# Altium PCB Pet_Tracker_PCB1.PcbDoc
Units mil, origin at the board's own origin, x right, y up, seen from the top; angles counter-clockwise.
Board outline 1653.54 x 1771.65 mil, 4 copper layers (Top Layer, Layer 1, Layer 2, Bottom Layer), stack 29.78 mil thick; 27 components, 60 nets, 237 pads, 75 vias.
Unrouted connection lines stored in the file: 7.
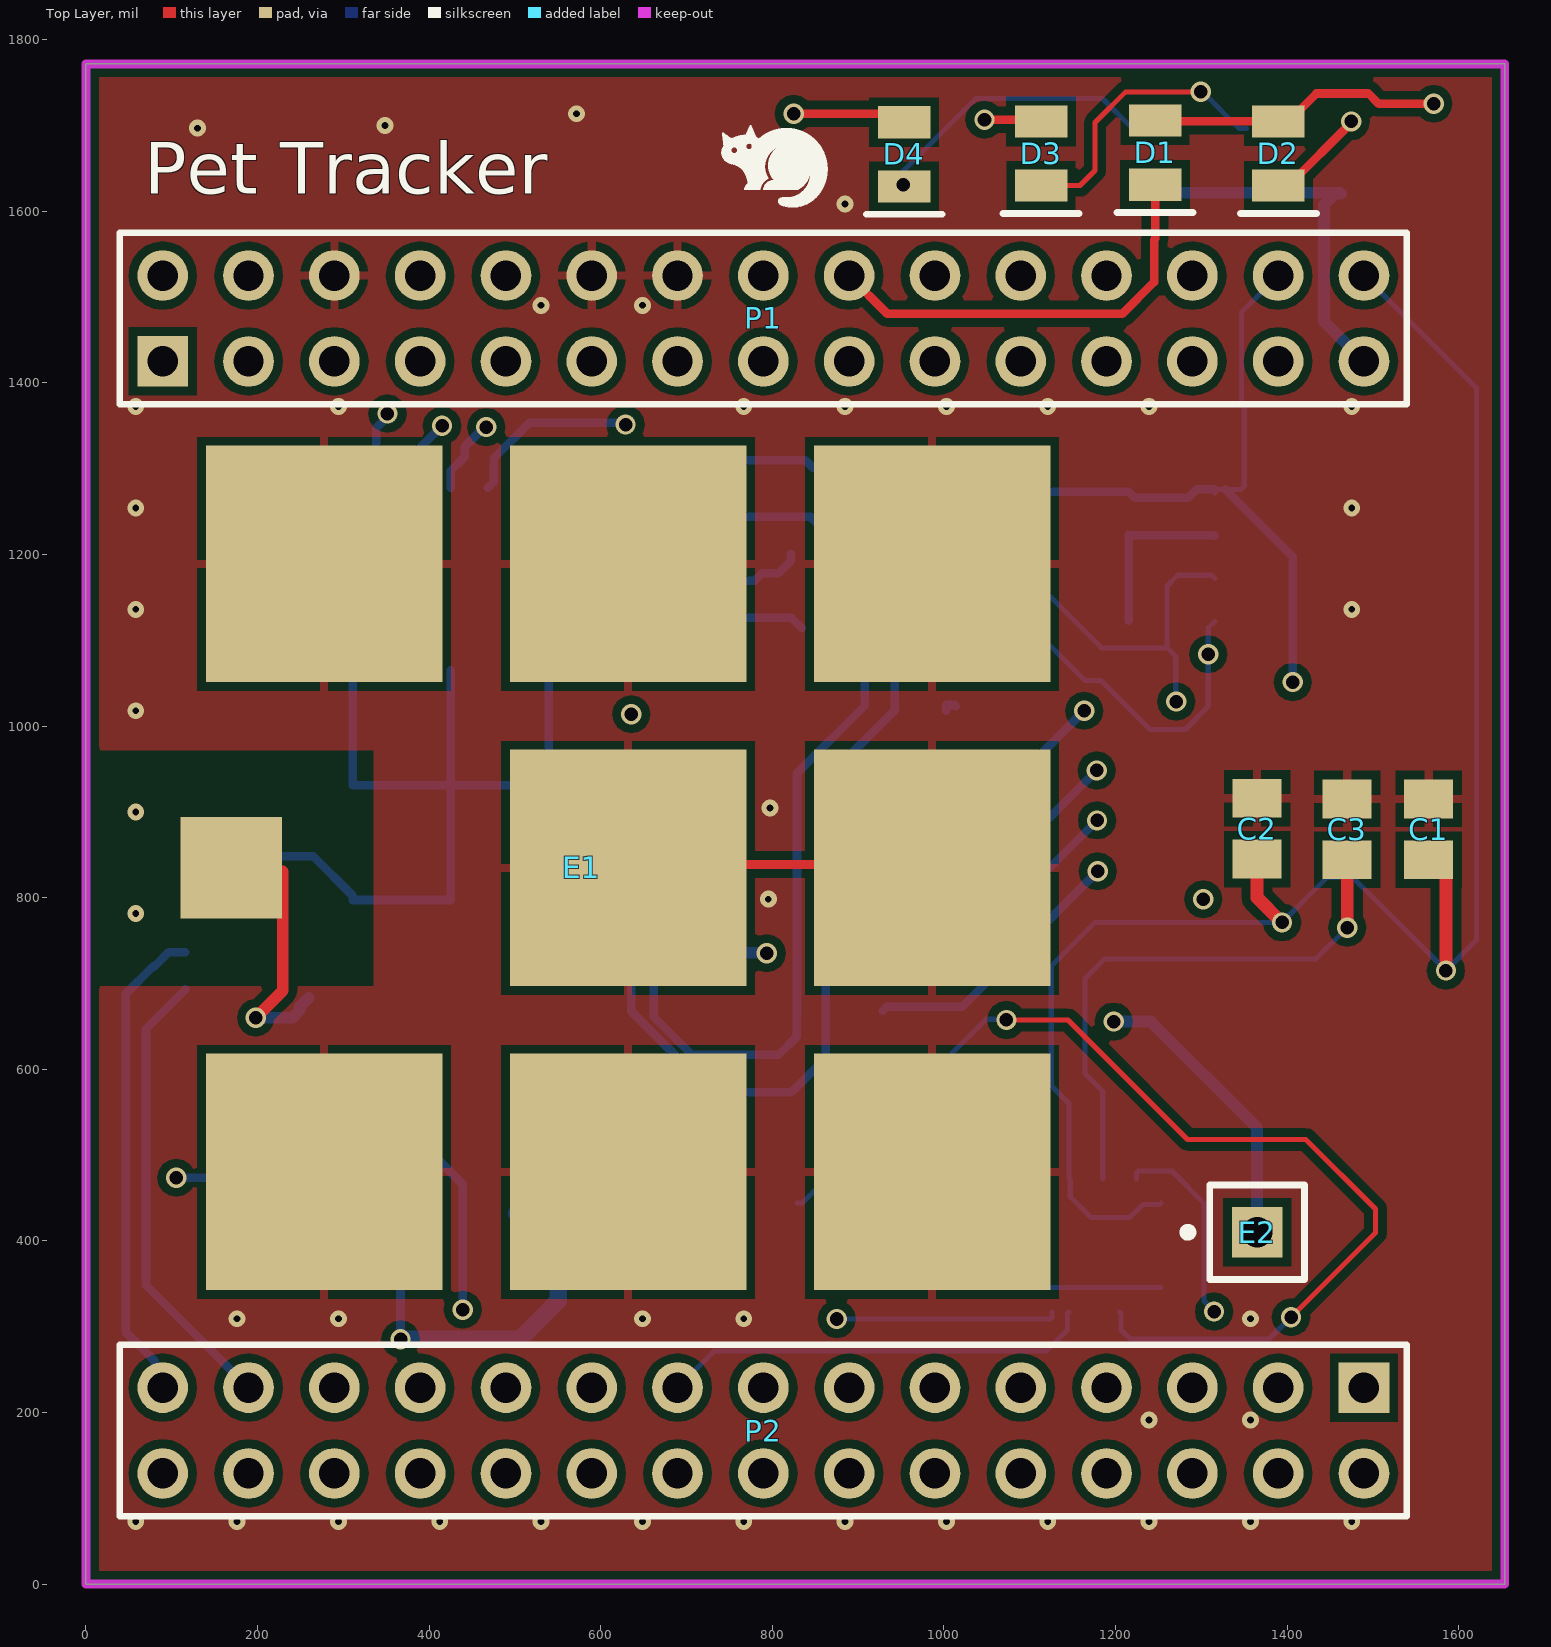
[diagram p0: Top Layer view]
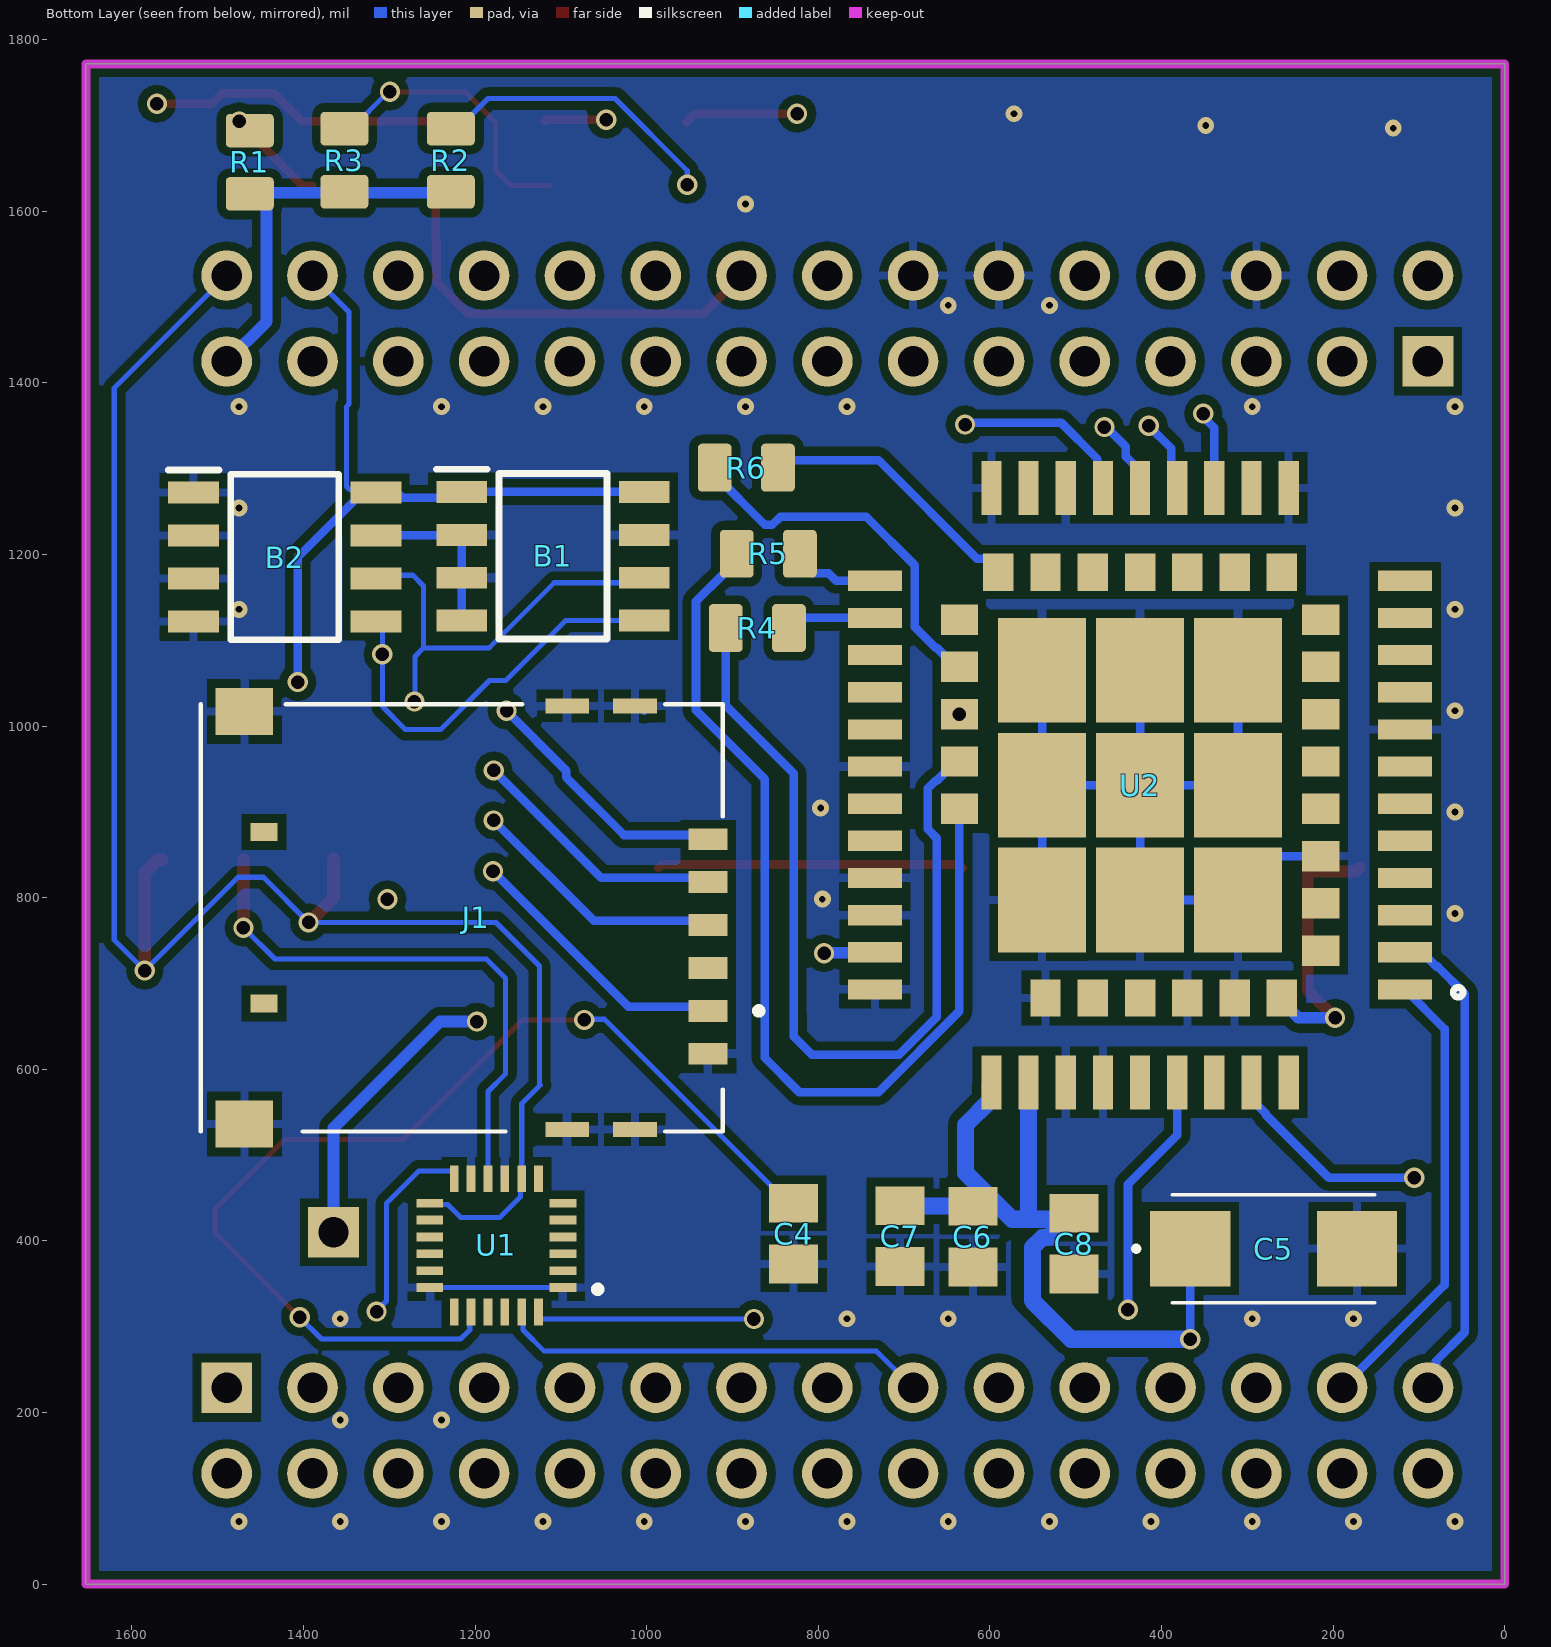
[diagram p1: Bottom Layer view, seen from below]
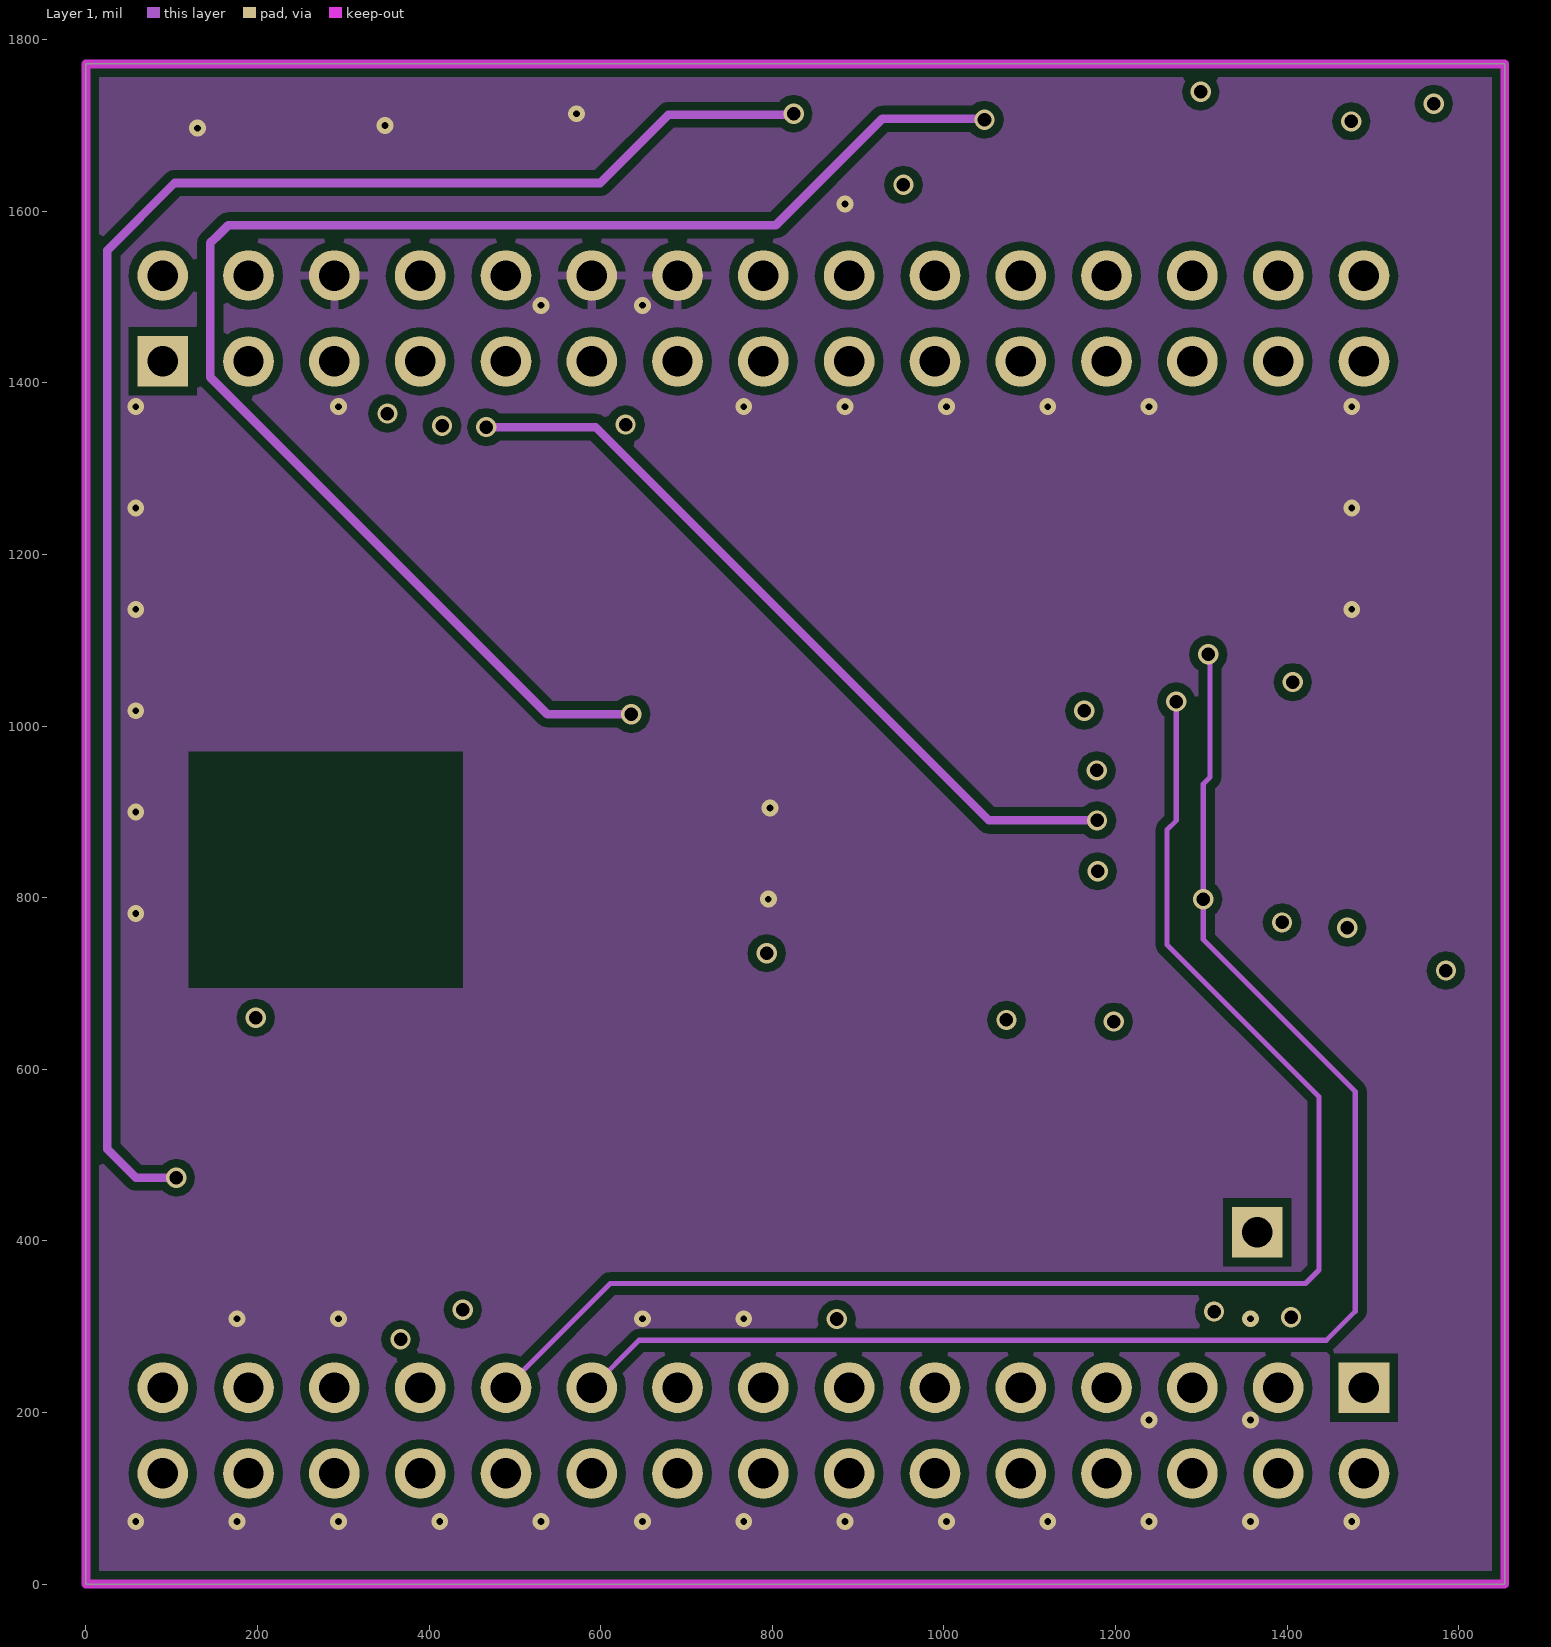
[diagram p2: Layer 1]
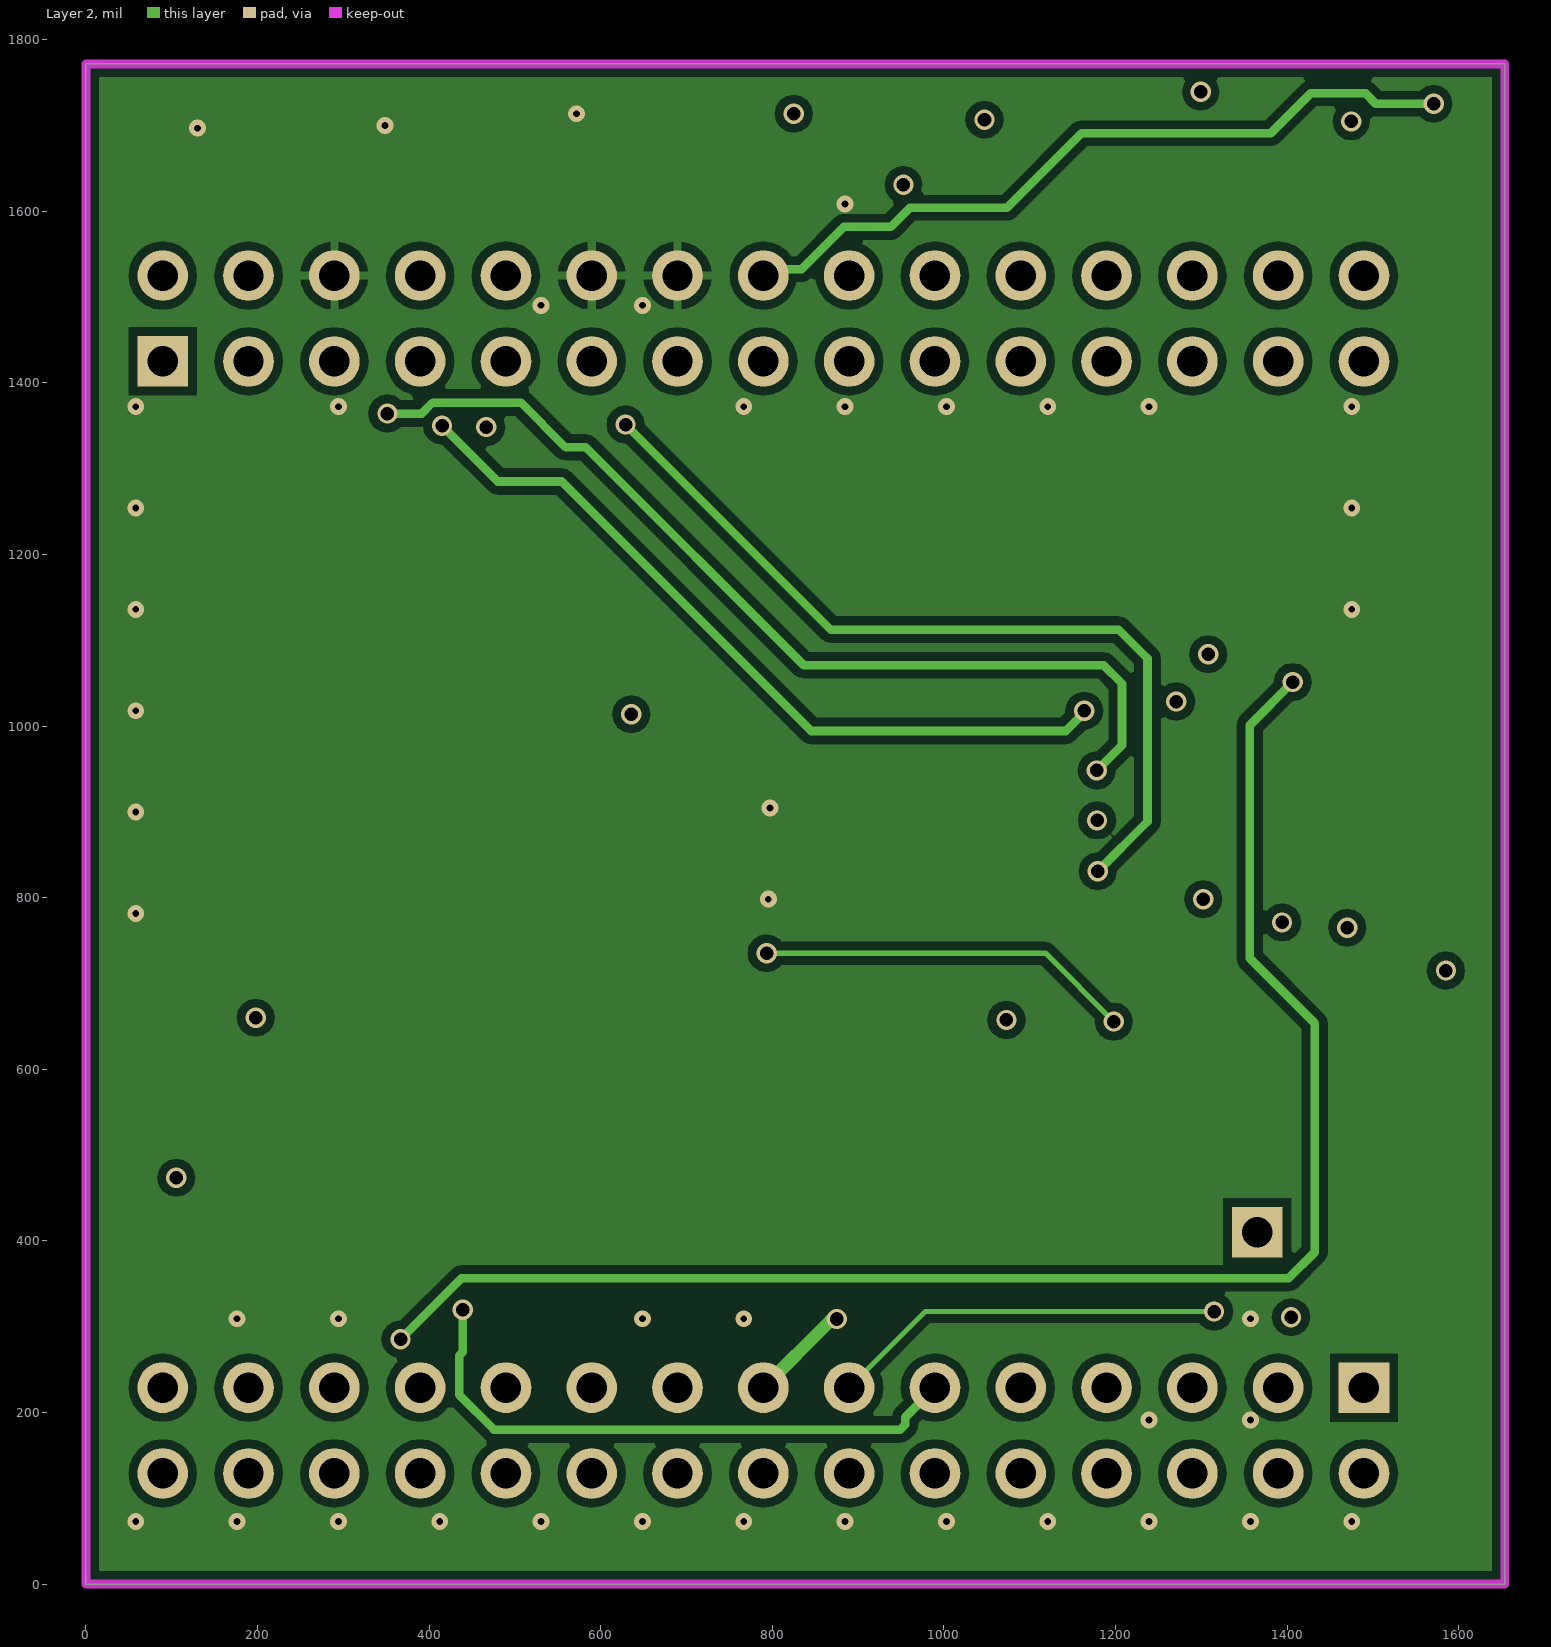
[diagram p3: Layer 2]
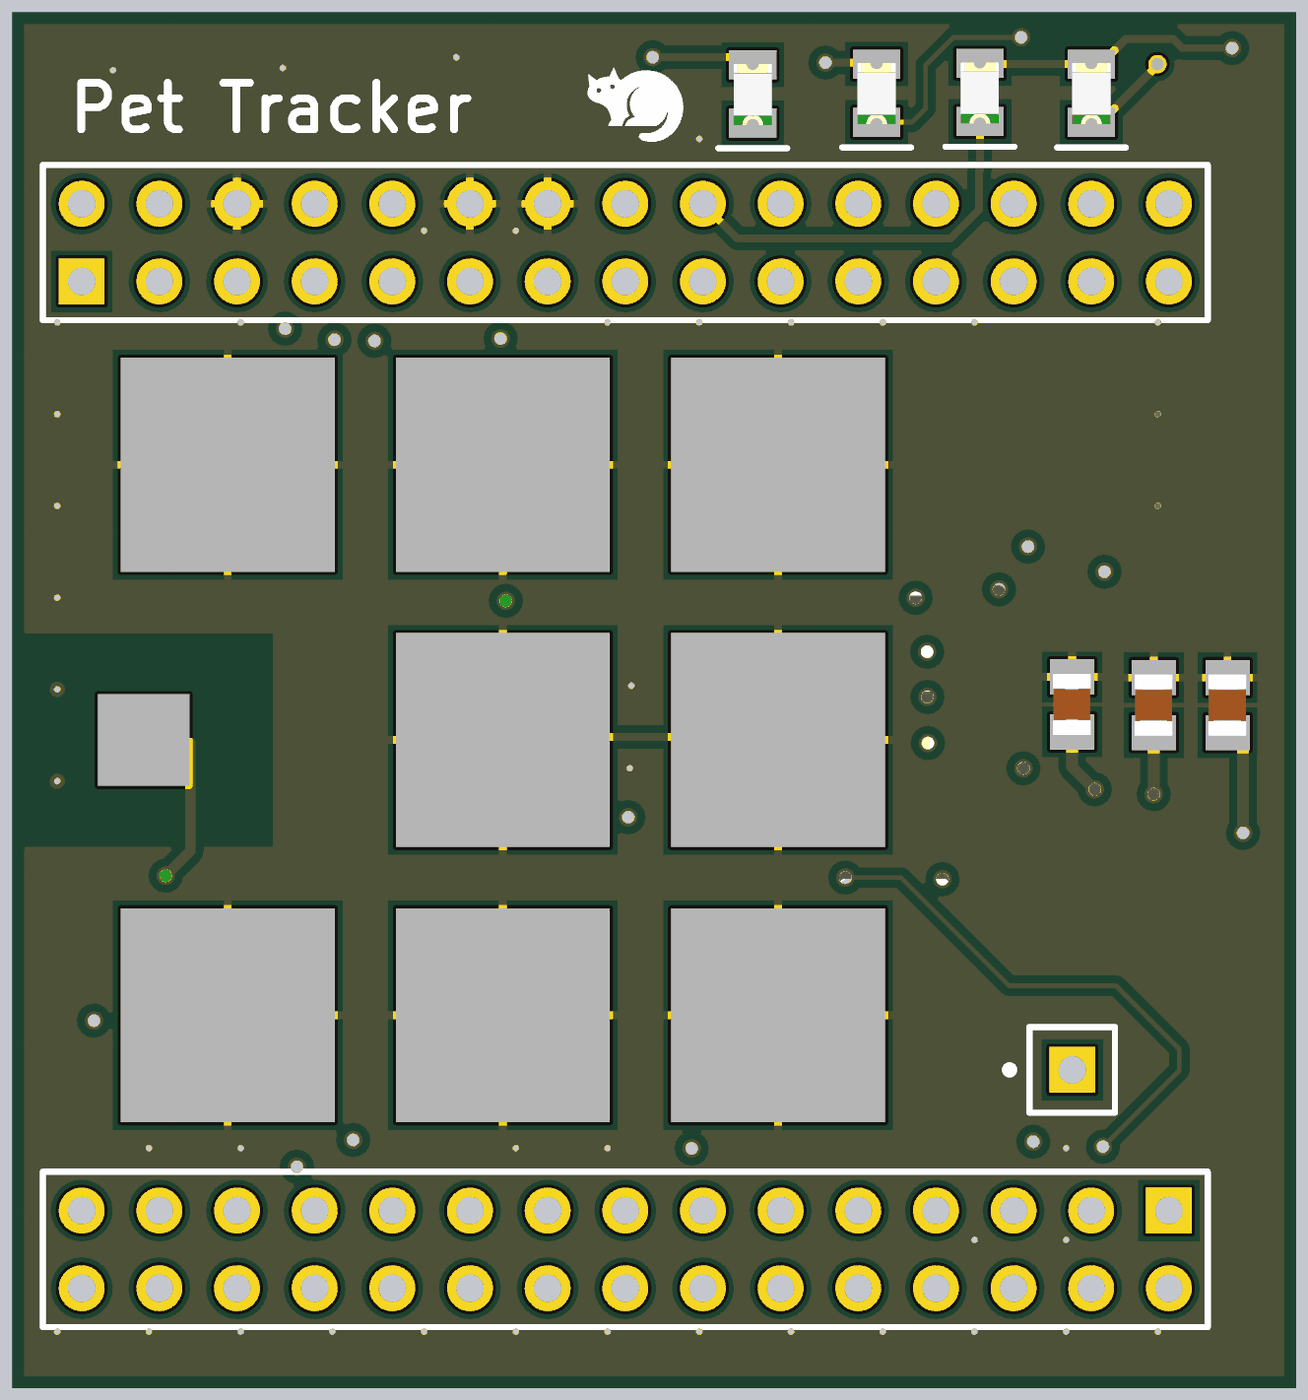
[diagram p4: 3D render of the assembled board from above, using the file's embedded part models]
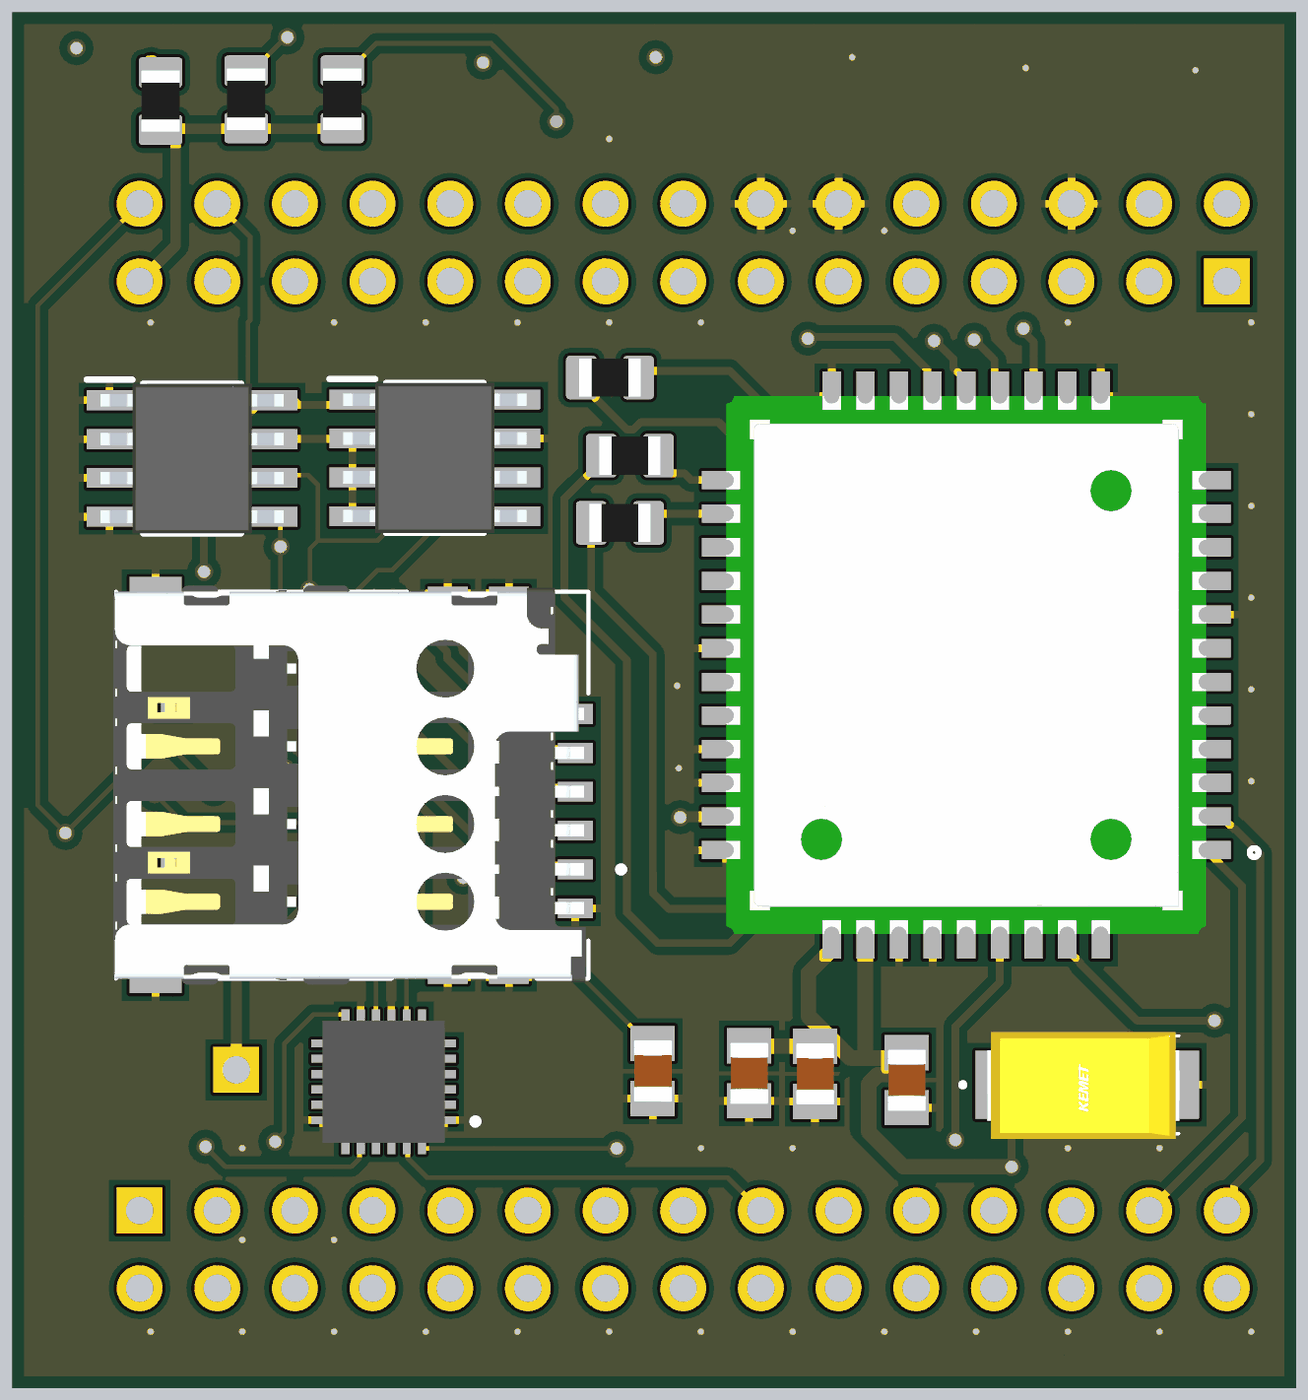
[diagram p5: 3D render of the assembled board from below, using the file's embedded part models]

## Layer stack, top to bottom
Top Solder: solder mask 0.4, Solder Resist, Dk 3.5
Top Layer: signal copper 1.378
Dielectric 2: prepreg 7.9921, PP-022, Dk 4.5
Layer 1: signal copper 0.5984
Dielectric 1: dielectric 9.8425, FR-4, Dk 4.8
Layer 2: signal copper 0.5984
Dielectric 3: prepreg 7.9921, PP-022, Dk 4.5
Bottom Layer: signal copper 1.378
Bottom Solder: solder mask 0.4, Solder Resist, Dk 3.5

## Board outline
0,0 0,1771.65 1653.54,1771.65 1653.54,0

## Design rules (kind name [scope] priority, off if disabled: settings)
Clearance [All] p1: gap=10 ignorepadtopadclearanceinfootprint=FALSE except(0: Arc-Hole Track-Hole SMDPad-Hole THPad-Hole Via-Hole Fill-Hole Poly-Hole Region-Hole Text-Hole; 3.54: Arc-Arc Arc-Track Track-Track; 5: SMDPad-SMDPad)
ComponentClearance [All] p1: gap=0 collisioncheckmode=3 verticalgap=0 showdistances=FALSE donotcheckwithout3dbody=TRUE
Height [All] p1: minheight=0 maxheight=3937.01 prefheight=500
MinimumSolderMaskSliver [All] p1: minsoldermaskwidth=0.32
PolygonConnect PolygonConnect_Via [IsVia] p1: thpad.connectstyle=Relief thpad.reliefconductorwidth=10 thpad.reliefentries=4 thpad.polygonreliefangle="90 Angle" thpad.airgapwidth=10 smdpad.connectstyle=Relief smdpad.reliefconductorwidth=10 smdpad.reliefentries=4 smdpad.polygonreliefangle="90 Angle" smdpad.airgapwidth=10 via.connectstyle=Direct via.reliefconductorwidth=10 via.reliefentries=4 via.polygonreliefangle="90 Angle" via.airgapwidth=10
PolygonConnect [All] p2: connectstyle=Relief reliefconductorwidth=10 reliefentries=4 polygonreliefangle="90 Angle" airgapwidth=10
RoutingVias [All] p1: holewidth=10.16 width=15.75 viastyle="Through Hole" minholewidth=5.91 minwidth=9.84 maxholewidth=39.37 maxwidth=47.24
SilkToSolderMaskClearance [IsPad] p1: minsilkscreentomaskgap=5.91 clearancetoexposedcopper=TRUE
SolderMaskExpansion [All] p1: expansion=4 istentingtop=FALSE
Width RF50 [InNetClass('RF')] p1: maxlimit=13.73 minlimit=6.23 preferedwidth=13.73 toplayer_minwidth=13.73 midlayer1_maxwidth=6.23 midlayer1_prefwidth=6.91 midlayer2_maxwidth=6.23 midlayer2_prefwidth=6.91 bottomlayer_minwidth=13.73 impedanceprofiledriven=TRUE impedanceprofileid={9640E81E-0014-46BB-B764-C6FE7C97A4BA} impedanceprofilevalue=50.000000 minimp=50.000000 maximp=50.000000 favimp=50.000000
Width [All] p2: maxlimit=59.06 minlimit=5.91 preferedwidth=10
26 further rules are at their usual default settings.

## Classes and differential pairs
net class RF: GNSS_ANT GSM_ANT
component class Schematic: B1 B2 C1 C2 C3 C4 D1 D2 D3 D4 P1 P2 R1 R2 R3 U1
component class Modem: C5 C6 C7 C8 E1 E2 J1 R4 R5 R6 U2

## Components (designator, comment, footprint, x,y, rotation, side; value= is the part's Value field where it differs from the comment)
B1 "8 Pin EEPROM" AT24C256 1109.25,1197.83 r180 bottom
B2 "8 Pin EEPROM" AT24C256 1421.86,1196.98 r180 bottom
C1 "10nF" CAP_0805 1565,879.57 r270 top
C2 "100nF" CAP_0805 1365,880.43 r270 top
C3 "100nF" CAP_0805 1470,879.57 r270 top
C4 "2.2nF" CAP_0805 828.74,408.46 r90 bottom
C5 "100uF" TANTALUM_CAP_0805 269.25,390.83 r180 bottom
C6 "10uF" CAP_0805 619.92,404.81 r90 bottom
C7 "33pF" CAP_0805 704.72,405.51 r90 bottom
C8 "10pF" CAP_0805 501.97,396.65 r90 bottom
D1 "Charge_LED" LED_0805 1246.06,1668.31 r90 top
D2 "Power on LED" LED_0805 1389.76,1667.32 r90 top
D3 "GPS" LED_0805 1113.19,1667.32 r90 top
D4 "\" LED_0805 953.61,1666.33 r90 top
E1 "GNSS_ANTENNA_SMD" GNSS_ANTENNA_SMD 631.89,834.65 r270 top
E2 "Antenna" PIN1 1365,410 r90 top
J1 "MICROSIM" MICROSIM 1215.63,776.5 r0 bottom
P1 "Header 15X2" HDR2X15 89.49,1425 r0 top
P2 "Header 15X2" HDR2X15 1489.49,228.9 r180 top
R1 "130" RES_0805 1462.6,1657.09 r90 bottom
R2 "130" RES_0805 1228.35,1659.45 r90 bottom
R3 "130" RES_0805 1352.36,1659.45 r90 bottom
R4 "0" RES_0805 871.06,1114.17 r180 bottom
R5 "0" RES_0805 858.27,1200.79 r180 bottom
R6 "10k" RES_0805 883.86,1301.18 r0 bottom
U1 "MPU-6050" MPU_6050 1175.2,394.68 r0 bottom
U2 "GPRS,GSM,GNSS Modem" SIM868 425,931.14 r0 bottom

## Footprints (in the part's own frame and the unit in brackets; to place one, negate y for a bottom-side part, rotate by r counter-clockwise, add the part's x,y. Pads: shape width x height; smd on the part's side, far side on the other; paste and mask are expansions set on the pad)
AT24C256 [mm]
  rect 1.5x0.65 smd: 1(-2.7,1.905) 2(-2.7,0.635) 3(-2.7,-0.635) 4(-2.7,-1.905) 5(2.7,-1.905) 6(2.7,-0.635) 7(2.7,0.635) 8(2.7,1.905)
  silkscreen extent -3.45,-2.45 1.6,2.58, body extent -3,-2.45 3,2.45, height 1.75
CAP_0805 [mm]
  rect 1.15x1.45 smd: 1(-0.9,0) 2(0.9,0)
  body extent -1,-0.64 1,0.62, height 0.94
GNSS_ANTENNA_SMD [mm]
  rect 3x3 smd: 1(0,-11.75)
  rect 7x7 smd: 2(-9,9) 2(-9,0) 2(-9,-9) 2(0,9) 2(0,0) 2(9,9) 2(9,0) 2(9,-9)
HDR2X15 [mm] "Connector; Header; 15x2 Position"
  rect 1.5x1.5 hole 0.9: 1(0,0)
  round 1.5 hole 0.9: 2(0,2.54) 3(2.54,0) 4(2.54,2.54) 5(5.08,0) 6(5.08,2.54) 7(7.62,0) 8(7.62,2.54) 9(10.16,0) 10(10.16,2.54) 11(12.7,0) 12(12.7,2.54) 13(15.24,0) 14(15.24,2.54) 15(17.78,0) 16(17.78,2.54) 17(20.32,0) 18(20.32,2.54) 19(22.86,0) 20(22.86,2.54) 21(25.4,0) 22(25.4,2.54) 23(27.94,0) 24(27.94,2.54) 25(30.48,0) 26(30.48,2.54) 27(33.02,0) 28(33.02,2.54) 29(35.56,0) 30(35.56,2.54)
  silkscreen extent -1.27,-1.27 36.83,3.81
LED_0805 [mm]
  rect 0.95x1.55 smd: 1(-0.95,0) 2(0.95,0)
  silkscreen extent -1.78,-1.12 -1.78,1.12, body extent -1.02,-0.63 0.98,0.63, height 0.7
MICROSIM [mm]
  rect 1.15x0.65 smd: C1(-7.295,2.755) C2(-7.295,0.215) C3(-7.295,-2.325) C5(-7.295,4.025) C6(-7.295,1.485) C7(-7.295,-1.055)
  rect 1.3x0.45 smd: G1(-5.125,6.27) G2(-3.125,6.27) G3(-5.125,-6.27) G4(-3.125,-6.27)
  rect 1.7x1.4 smd: G5(6.435,-6.105) G6(6.435,6.105)
  rect 0.8x0.54 smd: X1(5.855,2.54) X2(5.855,-2.54)
  silkscreen extent -8.89,-6.32 7.73,6.32, body extent -7.63,-6.53 7.82,6.53, height 1.55
MPU_6050 [mm]
  rect 0.79x0.26 smd: 1(-1.97,1.25) 2(-1.97,0.75) 3(-1.97,0.25) 4(-1.97,-0.25) 5(-1.97,-0.75) 6(-1.97,-1.25) 13(1.97,-1.25) 14(1.97,-0.75) 15(1.97,-0.25) 16(1.97,0.25) 17(1.97,0.75) 18(1.97,1.25)
  rect 0.26x0.79 smd: 7(-1.25,-1.97) 8(-0.75,-1.97) 9(-0.25,-1.97) 10(0.25,-1.97) 11(0.75,-1.97) 12(1.25,-1.97) 19(1.25,1.97) 20(0.75,1.97) 21(0.25,1.97) 22(-0.25,1.97) 23(-0.75,1.97) 24(-1.25,1.97)
  silkscreen extent -3.1,1.2 -2.9,1.4, body extent -2,-2 2,2, height 0.93
PIN1 [mm] "Generic Antenna; 1 Lead"
  rect 1.5x1.5 hole 0.9: 1(0,0)
  silkscreen extent -1.4,-1.4 1.4,2.17
RES_0805 [mm]
  rrect25% 1x1.42 smd: 1(-0.935,0) 2(0.935,0)
  body extent -1,-0.63 1,0.63, height 0.6
SIM868 [mm]
  rect 1.6x0.6 smd: 1(-7.85,6.05) 2(-7.85,4.95) 3(-7.85,3.85) 4(-7.85,2.75) 5(-7.85,1.65) 6(-7.85,0.55) 7(-7.85,-0.55) 8(-7.85,-1.65) 9(-7.85,-2.75) 10(-7.85,-3.85) 11(-7.85,-4.95) 12(-7.85,-6.05) 22(7.85,-6.05) 23(7.85,-4.95) 24(7.85,-3.85) 25(7.85,-2.75) 26(7.85,-1.65) 27(7.85,-0.55) 28(7.85,0.55) 29(7.85,1.65) 30(7.85,2.75) 31(7.85,3.85) 32(7.85,4.95) 33(7.85,6.05)
  rect 0.6x1.6 smd: 13(-4.4,-8.8) 14(-3.3,-8.8) 15(-2.2,-8.8) 16(-1.1,-8.8) 17(0,-8.8) 18(1.1,-8.8) 19(2.2,-8.8) 20(3.3,-8.8) 21(4.4,-8.8) 34(4.4,8.8) 35(3.3,8.8) 36(2.2,8.8) 37(1.1,8.8) 38(0,8.8) 39(-1.1,8.8) 40(-2.2,8.8) 41(-3.3,8.8) 42(-4.4,8.8)
  rect 1.1x0.9 smd: 43(-5.35,4.9) 44(-5.35,3.5) 45(-5.35,2.1) 46(-5.35,0.7) 47(-5.35,-0.7) 48(-5.35,-2.1) 49(-5.35,-3.5) 50(-5.35,-4.9) 58(5.35,-4.9) 59(5.35,-3.5) 60(5.35,-2.1) 61(5.35,-0.7) 62(5.35,0.7)
  rect 0.9x1.1 smd: 51(-4.2,-6.3) 52(-2.8,-6.3) 53(-1.4,-6.3) 54(0,-6.3) 55(1.4,-6.3) 56(2.8,-6.3) 57(4.2,-6.3) 63(2.8,6.3) 64(1.4,6.3) 65(0,6.3) 66(-1.4,6.3) 67(-2.8,6.3) 68(-4.2,6.3)
  rect 2.6x3.1 smd: 69(-2.9,3.4) 70(-2.9,0) 71(-2.9,-3.4) 72(0,-3.4) 73(2.9,-3.4) 74(2.9,0) 75(2.9,3.4) 76(0,3.4) 77(0,0)
  silkscreen extent -9.56,5.99 -9.27,6.28, body extent -7.85,-8.8 7.85,8.8, height 2.3
TANTALUM_CAP_0805 [mm]
  rect 2.37x2.23 smd: 1(-2.47,0) 2(2.47,0)
  silkscreen extent -4.12,-1.6 3,1.6, body extent -3.28,-1.78 3.02,1.72, height 2.81

## Part data
B1 B2: library part AT24C256C, "EEPROM 256K (32K X 8), 2-WI 1.8V /  / https://lt.farnell.com/microchip/at24c256c-sshl-t/serial-eeprom-256kbit-1mhz-soic/dp/2345588?st=AT24C256", Arrow Part Number=AT24C256C-SSHL-T, Manufacturer_Name=Microchip, Mouser Part Number=556-AT24C256C-SSHL-T, Arrow Price/Stock=https://www.arrow.com/en/products/at24c256c-sshl-t/microchip-technology?region=nac, Datasheet Link=http://www.atmel.com/Images/Atmel-8568-SEEPROM-AT24C256C-Datasheet.pdf, Geometry.Height=1.75mm, Manufacturer_Part_Number=AT24C256C-SSHL-T, Mouser Price/Stock=https://www.mouser.co.uk/ProductDetail/Microchip-Technology/AT24C256C-SSHL-T?qs=fzsaQExJLyR3ptk4tHE3tA%3D%3D
C1 C2 C3 C4 C6 C7 C8: library part SMT_CAP, Package=None, Availability=Unavailable, MP=LD051A270KAB2A, Price=None
C5: library part SMT_TANTALUM_CAP, "T491C107K016AT", Manufacturer_Name=KEMET, Mouser Part Number=80-T491C107K016AT, Arrow Part Number=T491C107K016AT, Arrow Price/Stock=https://www.arrow.com/en/products/t491c107k016at/kemet-corporation?region=nac, Datasheet Link=https://content.kemet.com/datasheets/KEM_T2005_T491.pdf, Geometry.Height=2.8mm, Manufacturer_Part_Number=T491C107K016AT, Mouser Price/Stock=https://www.mouser.co.uk/ProductDetail/KEMET/T491C107K016AT?qs=Si2vDv5E4YMke5HCn79NYA%3D%3D
D1 D2 D3 D4: library part LED, "PART: MULTICOMP PRO MP008291LED /  / https://lt.farnell.com/multicomp-pro/mp008291/led-green-70mcd-576nm-0805/dp/3796323?st=smt%20led", Manufacturer_Name="Avago Technologies", Manufacturer_Part_Number=HSMH-C170, Mouser Part Number=630-HSMH-C170, Datasheet Link=https://docs.broadcom.com/docs/AV02-0551EN, Geometry.Height=0.9mm, Mouser Price/Stock=https://www.mouser.co.uk/ProductDetail/Broadcom-Avago/HSMH-C170?qs=YDL0qNrpDT6b21G9HrN9ig%3D%3D
E1: "Ceramic GNSS antenna 25*25 SMD", Package=None, Availability="In Stock", Check_prices=https://www.snapeda.com/parts/ANT-GNSSCP-TH18L1/Linx/view-part/?ref=eda, MF=Linx, MP=ANT-GNSSCP-TH18L1, Price=None, Purchase-URL=https://pricing.snapeda.com/search/part/ANT-GNSSCP-TH18L1/?ref=eda, SnapEDA_Link=https://www.snapeda.com/parts/ANT-GNSSCP-TH18L1/Linx/view-part/?ref=snap
E2: "Generic Antenna", LatestRevisionDate=17-Jul-2002, LatestRevisionNote="Re-released for DXP Platform.", PackageReference=PIN1, Published=24-Mar-1999, Publisher="Altium Limited"
J1: "PART NR: 78646-3001", Package=None, Availability="In Stock", Check_prices=https://www.snapeda.com/parts/78646-3001/Molex/view-part/?ref=eda, MF=Molex, MP=78646-3001, Price=None, SnapEDA_Link=https://www.snapeda.com/parts/78646-3001/Molex/view-part/?ref=snap
P1 P2: "Header, 15-Pin, Dual row", LatestRevisionDate=17-Jul-2002, LatestRevisionNote="Re-released for DXP Platform.", Publisher="Altium Limited"
R1 R2 R3 R4 R5 R6: library part SMT_RES, Package=0805, Power_Rating=".25 W", Resistance=.33, Tolerance=1%, Availability="In Stock", Check_prices=https://www.snapeda.com/parts/2-2176053-0/TE+Connectivity/view-part/?ref=eda, EU_RoHS_Compliance="Compliant with Exemptions", MF="TE Connectivity", MP=2-2176053-0, Price=None, SnapEDA_Link=https://www.snapeda.com/parts/2-2176053-0/TE+Connectivity/view-part/?ref=snap
U1: "MPU-6050 series Accelerometer, Gyroscope, 3 Axis Sensor Evaluation Board /  / https://lt.farnell.com/invensense/mpu-6050/gyro-accel-6-axis-i2c-qfn-24/dp/1864742", Package="QFN-24 InvenSense", Availability="In Stock", Check_prices=https://www.snapeda.com/parts/MPU-6050/TDK+InvenSense/view-part/?ref=eda, MF="TDK InvenSense", MP=MPU-6050, Price=None, Purchase-URL=https://pricing.snapeda.com/search/part/MPU-6050/?ref=eda, SnapEDA_Link=https://www.snapeda.com/parts/MPU-6050/TDK+InvenSense/view-part/?ref=snap
U2: library part SIM868, Manufacturer_Name=SIMCOM, DeviceSetName=SIM868, GateName_1=G$1, Height=mm, LibraryName=SIM868, Manufacturer_Part_Number=SIM868, Package=SIM868, SymbolName_1=SIM868

## Via types
v1: diameter 19.68, hole 7.87, Top Layer to Bottom Layer, tented both sides, 43 vias
v2: diameter 23.62, hole 15.75, Top Layer to Bottom Layer, tented both sides, 31 vias
v3: diameter 23.62, hole 15.75, Top Layer to Bottom Layer, 1 vias

## Nets (pads, with @x,y where several pads share a name; then routed paths per layer and width w, separated by ;. In a path a pad name is that pad's centre, name@x,y a point inside that pad or via, vN(x,y) a via of type N, cw(c..) or ccw(c..) an arc to the next point about the centre after c; other vN are vias at no path point)
3V3: C1.2 C2.2 P1.30 U1.8 U1.13 | length 2054.9
  Top Layer w15: C2.2 1365,799.86 1393.73,771.13 v2(1394.04,771.13) ; C1.2 1569.86,844.13 1585,829 v2(1585,715)
  Bottom Layer w6: U1.13 1251.19,442.33 1231.82,442.33 1216.65,427.17 1171.38,427.17 1147.24,451.31 1147.24,470.68 U1.8 1145.67,560.04 1124.02,581.69 1125,582.68 1125,720.47 1175.66,771.13 v2(1394.04,771.13) 1446.73,823.82 1476.18,823.82 v2(1585,715) 1620.6,750.6 1620.6,1393.89 P1.30
4V: B1.1 B1.8 B2.8 C5.1 C6.2 C7.2 C8.2 P1.28 U2.34 U2.35 | length 3758.4
  Layer 2 w10: v2(366.62,285.24) 437.69,356.3 1401.57,356.3 1432.09,386.81 1432.09,653.49 1356.3,729.27 1356.3,1000.97 v2(1406.56,1051.23)
  Bottom Layer w6: B2.8 1319.37,1275.79 1327.76,1275.79 1346.49,1275.79 1350,1279.3 1350,1372.19 1346.96,1375.23 1346.96,1482.47 P1.28
  Bottom Layer w10: v2(366.62,285.24) 366.62,390.7 C5.1 ; C5.1@381.42,405.75 C5.1@376.42,400.75 ; C5.1@386.42,407.99 386.42,400.75 C5.1@376.42,400.75 ; C5.1@388.4,410.75 376.42,410.75 366.5,400.83 C5.1 ; B1.8 B1.1 1218.5,1269.88 1222.42,1265.96 1284.47,1265.96 1294.29,1275.79 B2.8@1315.56,1275.79 ; B2.8@1327.76,1275.79 1406.56,1196.98 v2(1406.56,1051.23) ; C5.1 C5.1@376.42,400.75
  Bottom Layer w20: v2(366.62,285.24) 505.45,285.24 550.51,330.3 550.51,392.14 538.8,403.86 532.23,403.86 520.51,415.57 520.51,419.45 507.87,432.09 C8.2 508.86,425.2 554.92,425.2 ; U2.35 554.92,425.2 ; U2.34 600.04,582.87 600.04,563.18 628.32,534.9 628.32,479.39 C6.2@601.6,452.66 ; C7.2 704.37,440.59 635.32,440.59 627.44,432.72 607.5,452.66 C6.2@601.6,452.66 ; 554.92,425.2 574.13,425.2 C6.2@601.6,452.66
5V: P1.26
5V_UNREGULATED: P1.24
5V_USB_CHRG: P1.22
ACC_INT: P2.13 U1.12 | length 695.2
  Layer 2 w6: P2.13 978.16,317.57 v2(1314.84,317.57)
  Bottom Layer w6: U1.12 1224.41,479.15 1226.53,481.27 1265.78,481.27 1303.15,443.9 1303.15,329.89 1314.84,318.2 v2(1314.84,317.57)
CH_LED_CA: D1.1 P1.18 | length 503.1
  Top Layer w10: P1.18 934.02,1480.47 1207.93,1480.47 1244.96,1517.5 1244.96,1566.8 1246.06,1567.9 D1.1
GND: B1.2 B1.3 B1.4 B1.7 B2.1 B2.2 B2.3 B2.4 B2.7 C1.1 C2.1 C3.1 C4.1 C5.2 C6.1 C7.1 C8.1 E1.2 J1.C5 J1.G1 J1.G2 J1.G3 J1.G4 J1.G5 J1.G6 P1.6 P1.12 P1.14 U1.1 U1.9 U1.11 U1.18 U2.8 U2.13 U2.19 U2.21 U2.27 U2.30 U2.31 U2.33 U2.36 U2.37 U2.45 U2.63 U2.66 U2.67 U2.69 U2.70 U2.71 U2.72 U2.73 U2.74 U2.75 U2.76 U2.77 | length 1867.4
  Top Layer w10: E1.2@631.89,834.65 635.83,838.58 982.28,838.58 E1.2@986.22,834.65
  Bottom Layer w6: U1.1 1097.84,345.68 1252.55,345.68 U1.18
  Bottom Layer w10: U2.45 264.65,848.46 310.83,802.28 U2.69 U2.76 U2.77 ; U2.71 U2.70 U2.77 ; U2.72 U2.77 ; U2.75 U2.74@539.17,940 ; U2.73 U2.74@539.17,940 ; J1.G3@1002.87,1017.87 1002.87,1024.49 1012.72,1024.49 J1.G3 ; B1.4 B1.3 B1.2 1215.98,1222.41 1315.13,1222.41 B2.7 ; U2.77 530.31,931.14 U2.74@539.17,940
  other v1: 57.99,72.99 176.1,72.99 294.21,72.99 412.32,72.99 530.43,72.99 648.54,72.99 766.65,72.99 884.76,72.99 1002.87,72.99 1120.98,72.99 1239.09,72.99 1357.2,72.99 1475.31,72.99 1239.09,191.1 1357.2,191.1 176.1,309.21 294.21,309.21 648.54,309.21 766.65,309.21 1357.2,309.21 57.99,781.65 795.28,798.23 57.99,899.76 797.24,904.53 57.99,1017.87 57.99,1135.98 1475.31,1135.98 57.99,1254.09 1475.31,1254.09 57.99,1372.2 294.21,1372.2 766.65,1372.2 884.76,1372.2 1002.87,1372.2 1120.98,1372.2 1239.09,1372.2 1475.31,1372.2 530.43,1490.31 648.54,1490.31 884.76,1608.42 129.92,1696.85 348.43,1699.8 571.85,1713.58
GNSS_ANT: E1.1 U2.68 | length 319.4
  Top Layer w13.73: E1.1 173.4,830.54 229.43,830.54 229.43,691.67 v2(197.76,660)
  Bottom Layer w13.73: v2(197.76,660) 240.76,660 248.8,668.04 248.8,672.26 U2.68
GNSS_STATUS: D3.2 U2.60 | length 1845.2
  Top Layer w10: v2(1047.24,1706.69) 1117.13,1706.69 D3.2@1119.09,1704.72
  Layer 1 w10: v2(635.63,1013.82) 537.7,1013.82 144.96,1406.56 144.96,1563.2 150.82,1569.06 151.29,1569.06 165.81,1583.58 804.05,1583.58 928.15,1707.68 1046.26,1707.68 v2(1047.24,1706.69)
GPS_RX: R5.1 U2.62 | length 1159
  Bottom Layer w10: U2.62 635.63,667.52 729.91,573.24 822.26,573.24 862.2,613.19 862.2,937.99 942.56,1018.35 942.56,1145.46 926.37,1161.65 925.95,1161.65 895.08,1192.52 R5.1
GPS_TX: R4.1 U2.61 | length 1022.8
  Bottom Layer w10: U2.61 639.57,958.7 661.97,936.3 663.5,936.3 672.29,927.51 672.29,879.65 661.97,869.34 661.97,660.86 705.71,617.13 807.59,617.13 828.45,637.98 828.45,663.6 828.74,663.89 828.74,944.88 907.87,1024.02 R4.1
GSM_ANT: E2.1 U2.32 | length 837.3
  Layer 2 w6.23: v2(793.31,735.24) 1118.11,735.24 v2(1197.83,655.51)
  Bottom Layer w13.73: U2.32 734.57,735.75 792.8,735.75 v2(793.31,735.24) ; v2(1197.83,655.51) 1241.14,655.51 1365,531.65 E2.1
GSM_PWRKEY: P2.11 U2.39 | length 986.2
  Layer 2 w10: v2(439.08,319.78) 439.08,270.29 435,266.21 435,220.41 475.41,180 949.14,180 955,185.86 955,194.41 P2.11
  Bottom Layer w10: U2.39 381.69,523.31 439.08,465.92 v2(439.08,319.78)
GSM_STATUS: D4.2 U2.41 | length 2389.2
  Top Layer w10: v2(824.8,1713.58) 943.76,1713.58 D4.2
  Layer 1 w10: v2(105.32,473.43) 58.2,473.43 25,506.63 25,1554.53 103.35,1632.87 599.41,1632.87 678.91,1712.37 822.61,1712.37 v2@824.8,1714.57
  Bottom Layer w10: v2(105.32,473.43) 205.03,473.43 278.58,546.97 278.58,548.49 295.08,564.99 U2.41
I2C1SCL: B1.6 B2.6 P2.21 | length 2236.9
  Layer 1 w6: P2.21 610.98,350.39 1421.26,350.39 1437.01,366.14 1437.01,567.99 1260,745 1260,879.05 1270.67,889.72 v2(1270.67,1028.54)
  Bottom Layer w6: B1.6 1008.86,1166.93 1107.8,1166.93 1183.59,1091.13 1260,1091.13 ; v2(1270.67,1028.54) 1270.16,1029.05 1270.16,1080.97 1260,1091.13 ; B2.6 1311.75,1175.79 1272.5,1175.79 1260,1163.29 1260,1091.13
I2C1SDA: B1.5 B2.5 P2.19 | length 2241
  Layer 1 w6: P2.19 644.68,284.09 1445.5,284.09 1479.33,317.91 1479.33,574.06 1302.17,751.22 v2(1302.17,798.23) 1302.17,932.54 1310.04,940.42 1310.04,1081.69 v2(1308.07,1083.66)
  Bottom Layer w6: B1.5 1094.69,1122.83 1164.37,1053.15 1183.07,1053.15 1240.16,996.06 1281.5,996.06 1308.07,1022.64 v2(1308.07,1083.66) 1308.07,1114.49 B2.5
I2C2SCL: P2.17 U1.23 | length 504.1
  Bottom Layer w6: P2.17 732.02,271.43 1119.34,271.43 1144.1,296.19 1144.1,315.56 U1.23
I2C2SDA: P2.15 U1.24 | length 376.6
  Layer 2 w15: P2.15 867.84,307.25 873.35,307.25 v2(875,308.9)
  Bottom Layer w6: v2(875,308.9) 1123.87,308.9 1125.98,311.02 U1.24
NetC3_2: C3.2 U1.10 | length 651.4
  Top Layer w15: v2(1470,765) C3.2
  Bottom Layer w6: U1.10 1185.04,573.96 1164.37,594.63 1164.37,705.82 1186.9,728.35 1433.35,728.35 v2(1470,765)
NetC4_2: C4.2 U1.20 | length 1256.3
  Top Layer w6: v2(1072.83,657.48) 1144.68,657.48 1283.96,518.21 1421.75,518.21 1502.95,437.01 1502.95,409.45 v2(1404.53,311.02)
  Bottom Layer w6: C4.2 834.65,443.9 1049.02,658.28 1072.04,658.28 v2(1072.83,657.48) ; U1.20 1206.29,315.56 1206.29,296.19 1217.05,285.43 1378.94,285.43 v2(1404.53,311.02)
NetD2_1: D2.1 R1.2 | length 116.9
  Top Layer w10: D2.1 1401.57,1629.92 1474.74,1703.09 v3(1474.74,1704.72)
NetD3_1: D3.1 R3.2 | length 334.9
  Top Layer w6: D3.1 1158.46,1629.92 1176.18,1647.64 1176.18,1703.42 1211.93,1739.17 v2(1299.21,1739.17)
  Bottom Layer w6: v2(1299.21,1739.17) 1301.18,1739.17 1344.09,1696.26 R3.2
NetD4_1: D4.1 R2.2 | length 341.5
  Bottom Layer w6: v2(952.76,1630.91) 952.76,1647.29 1036.97,1731.5 1184.83,1731.5 1220.08,1696.26 R2.2
NetR6_1: R6.1 U2.57 | length 316.4
  Bottom Layer w10: U2.57 590.35,1182.34 603.07,1195.05 615.05,1195.05 730,1310 838.23,1310 R6.1
NetR6_2: R6.2 U2.59 | length 436
  Bottom Layer w10: U2.59 639.57,1068.94 661.96,1091.34 663.5,1091.34 687.57,1115.4 687.57,1187.35 743.95,1243.74 844.47,1243.74 853.84,1234.37 862.13,1234.37 920.67,1292.91 R6.2
NRESET: P1.10
PA6: P2.7
PA7: P2.5
PA8: P2.3
PA11: P2.1
PA12: P1.29 R1.1 R2.1 R3.1 | length 461.7
  Bottom Layer w13.73: R2.1 1229.53,1621.46 1461.42,1621.46 R1.1 1455.92,1620.28 1443.1,1607.46 1443.1,1471.39 P1.29
PB0: P1.27
PB1: P1.25
PB2: P1.23
PB12: P1.21
PB13: P1.19
PB14: P1.17
PB15: P1.15
PC4: P1.13
PC6: P1.11
PC7: P1.9
PC8: P1.7
PC9: P1.5
PC10: P1.3
PC11: P1.1
POWER_ON: D1.2 D2.2 P1.16 | length 1231.3
  Top Layer w10: D1.2@1245.83,1705.47 D1.2 1247.05,1704.72 D2.2 1401.57,1704.72 1434.06,1737.2 1494.71,1737.2 1506.52,1725.39 v2(1570.87,1725.39)
  Layer 2 w10: P1.16@780.25,1534.24 P1.16 796.99,1532.5 834.02,1532.5 883.21,1581.69 937.99,1581.69 960.39,1604.09 1073.58,1604.09 1160.43,1690.94 1380.91,1690.94 1427.42,1737.46 1491.27,1737.46 1503.34,1725.39 v2(1570.87,1725.39)
SIM_CLOCK: J1.C3 U2.16 | length 1294.4
  Layer 2 w10: v2(415,1350) 480,1285 554.57,1285 845.31,994.25 1141.86,994.25 1163.39,1015.78 v2(1163.39,1017.72)
  Bottom Layer w10: U2.16 381.69,1297.28 388.5,1304.09 388.5,1323.5 v2(415,1350) ; J1.C3 933.43,873.03 1026.57,873.03 1093.68,940.13 1093.68,948.01 v2(1163.39,1017.72)
SIM_DATA: J1.C7 U2.15 | length 1506
  Layer 2 w10: v2(351.38,1364.17) 391.26,1364.17 404.05,1376.97 506.89,1376.97 559.06,1324.8 582.68,1324.8 836.61,1070.87 1186.02,1070.87 1207.47,1049.42 1207.47,977.56 v2(1178.15,948.23)
  Bottom Layer w10: U2.15 338.39,1347.5 351.38,1360.49 v2(351.38,1364.17) ; J1.C7 933.43,823.03 1052.95,823.03 v2(1178.15,948.23)
SIM_RESET: J1.C2 U2.17 | length 1296.7
  Layer 1 w10: v2(466.54,1348.43) 593.97,1348.43 1052.36,890.04 v2(1178.5,890.04)
  Bottom Layer w10: U2.17 425,1297.28 441.5,1313.78 441.5,1325.4 v2@469.51,1353.41 ; J1.C2 933.43,773.03 1061.49,773.03 v2(1178.5,890.04)
SIM_VCC: J1.C1 U2.18 | length 1520.2
  Layer 2 w10: v2(628.94,1351.38) 867.85,1112.46 1203.48,1112.46 1237.2,1078.74 1237.2,888.78 v2(1179.13,830.71)
  Bottom Layer w10: U2.18 475.12,1284.41 475.12,1311.65 516.88,1353.41 626.9,1353.41 v2(628.94,1351.38) ; J1.C1 933.43,673.03 1021.46,673.03 v2(1179.13,830.71)
SWCLK: P1.4
SWDIO: P1.8
UART1RX: P2.27 U2.1 | length 532.6
  Bottom Layer w10: U2.1 70,647.01 70,348.39 P2.27
UART1TX: P2.29 U2.2 | length 566.4
  Bottom Layer w10: P2.29 80.1,238.28 80.1,259.9 46.48,293.52 46.48,688.01 78.23,719.76 79.76,719.76 96.26,736.26 U2.2
UART2_RX: R4.2 U2.23 | length 110.1
  Bottom Layer w10: U2.23 740.08,1120 746.1,1126.02 822.41,1126.02 R4.2
UART2_TX: R5.2 U2.22 | length 105.3
  Bottom Layer w10: U2.22 779.33,1169.33 787.83,1177.83 806.77,1177.83 821.46,1192.52 R5.2
UART2RX: P2.23
UART2TX: P2.25
V_Bat: P1.20
pads on no net: J1.C6 J1.X1 J1.X2 P1.2 P2.2 P2.4 P2.6 P2.8 P2.9 P2.10 P2.12 P2.14 P2.16 P2.18 P2.20 P2.22 P2.24 P2.26 P2.28 P2.30 U1.2 U1.3 U1.4 U1.5 U1.6 U1.7 U1.14 U1.15 U1.16 U1.17 U1.19 U1.21 U1.22 U2.3 U2.4 U2.5 U2.6 U2.7 U2.9 U2.10 U2.11 U2.12 U2.14 U2.20 U2.24 U2.25 U2.26 U2.28 U2.29 U2.38 U2.40 U2.42 U2.43 U2.44 U2.46 U2.47 U2.48 U2.49 U2.50 U2.51 U2.52 U2.53 U2.54 U2.55 U2.56 U2.58 U2.64 U2.65

## Polygon pours and split planes (outlines as drawn)
GND on Bottom Layer "GND_L04_P003" (solid, remove dead copper, pour order 3): 0,0 0,1771.65 1653.54,1771.65 1653.54,0
GND on Layer 1 "GND_L02_P001" (solid, remove dead copper, pour order 1): 0,0 0,1771.65 1653.54,1771.65 1653.54,0
GND on Top Layer "GND_L01_P000" (solid, remove dead copper, pour order 0): 0,0 0,1771.65 1653.54,1771.65 1653.54,0
GND on Layer 2 "GND_L03_P002" (solid, remove dead copper, pour order 2): 0,0 0,1771.65 1653.54,1771.65 1653.54,0

## Keep-outs
Keep-Out Layer:
  the board outline again, w10

## Other copper
Top Layer:
  pour cut-out: 16.73,971.85 335.63,971.85 335.63,696.85 16.73,696.85
Layer 1:
  pour cut-out: 120,970 438.9,970 438.9,695 120,695

## Silkscreen, mask and mechanical layers (free items; w line width, h text height)
Top Overlay:
  region: 2258 vertices and 2 holes, not listed, extent 740.7,1604.52 864.28,1700.35
  text "Pet Tracker" at 68.07,1620.24 h60

## Dimensions
0,1771.65 to 1653.54,1771.65 on Mechanical 1
0,0 to 0,1771.65 on Mechanical 1